# Altium PCB R3D902.PcbDoc
Units mil, origin at the board's own origin, x right, y up, seen from the top; angles counter-clockwise.
Board outline 3947.04 x 3947.04 mil, 2 copper layers (Top Layer, Bottom Layer); 90 components, 0 nets, 371 pads, 65 vias.
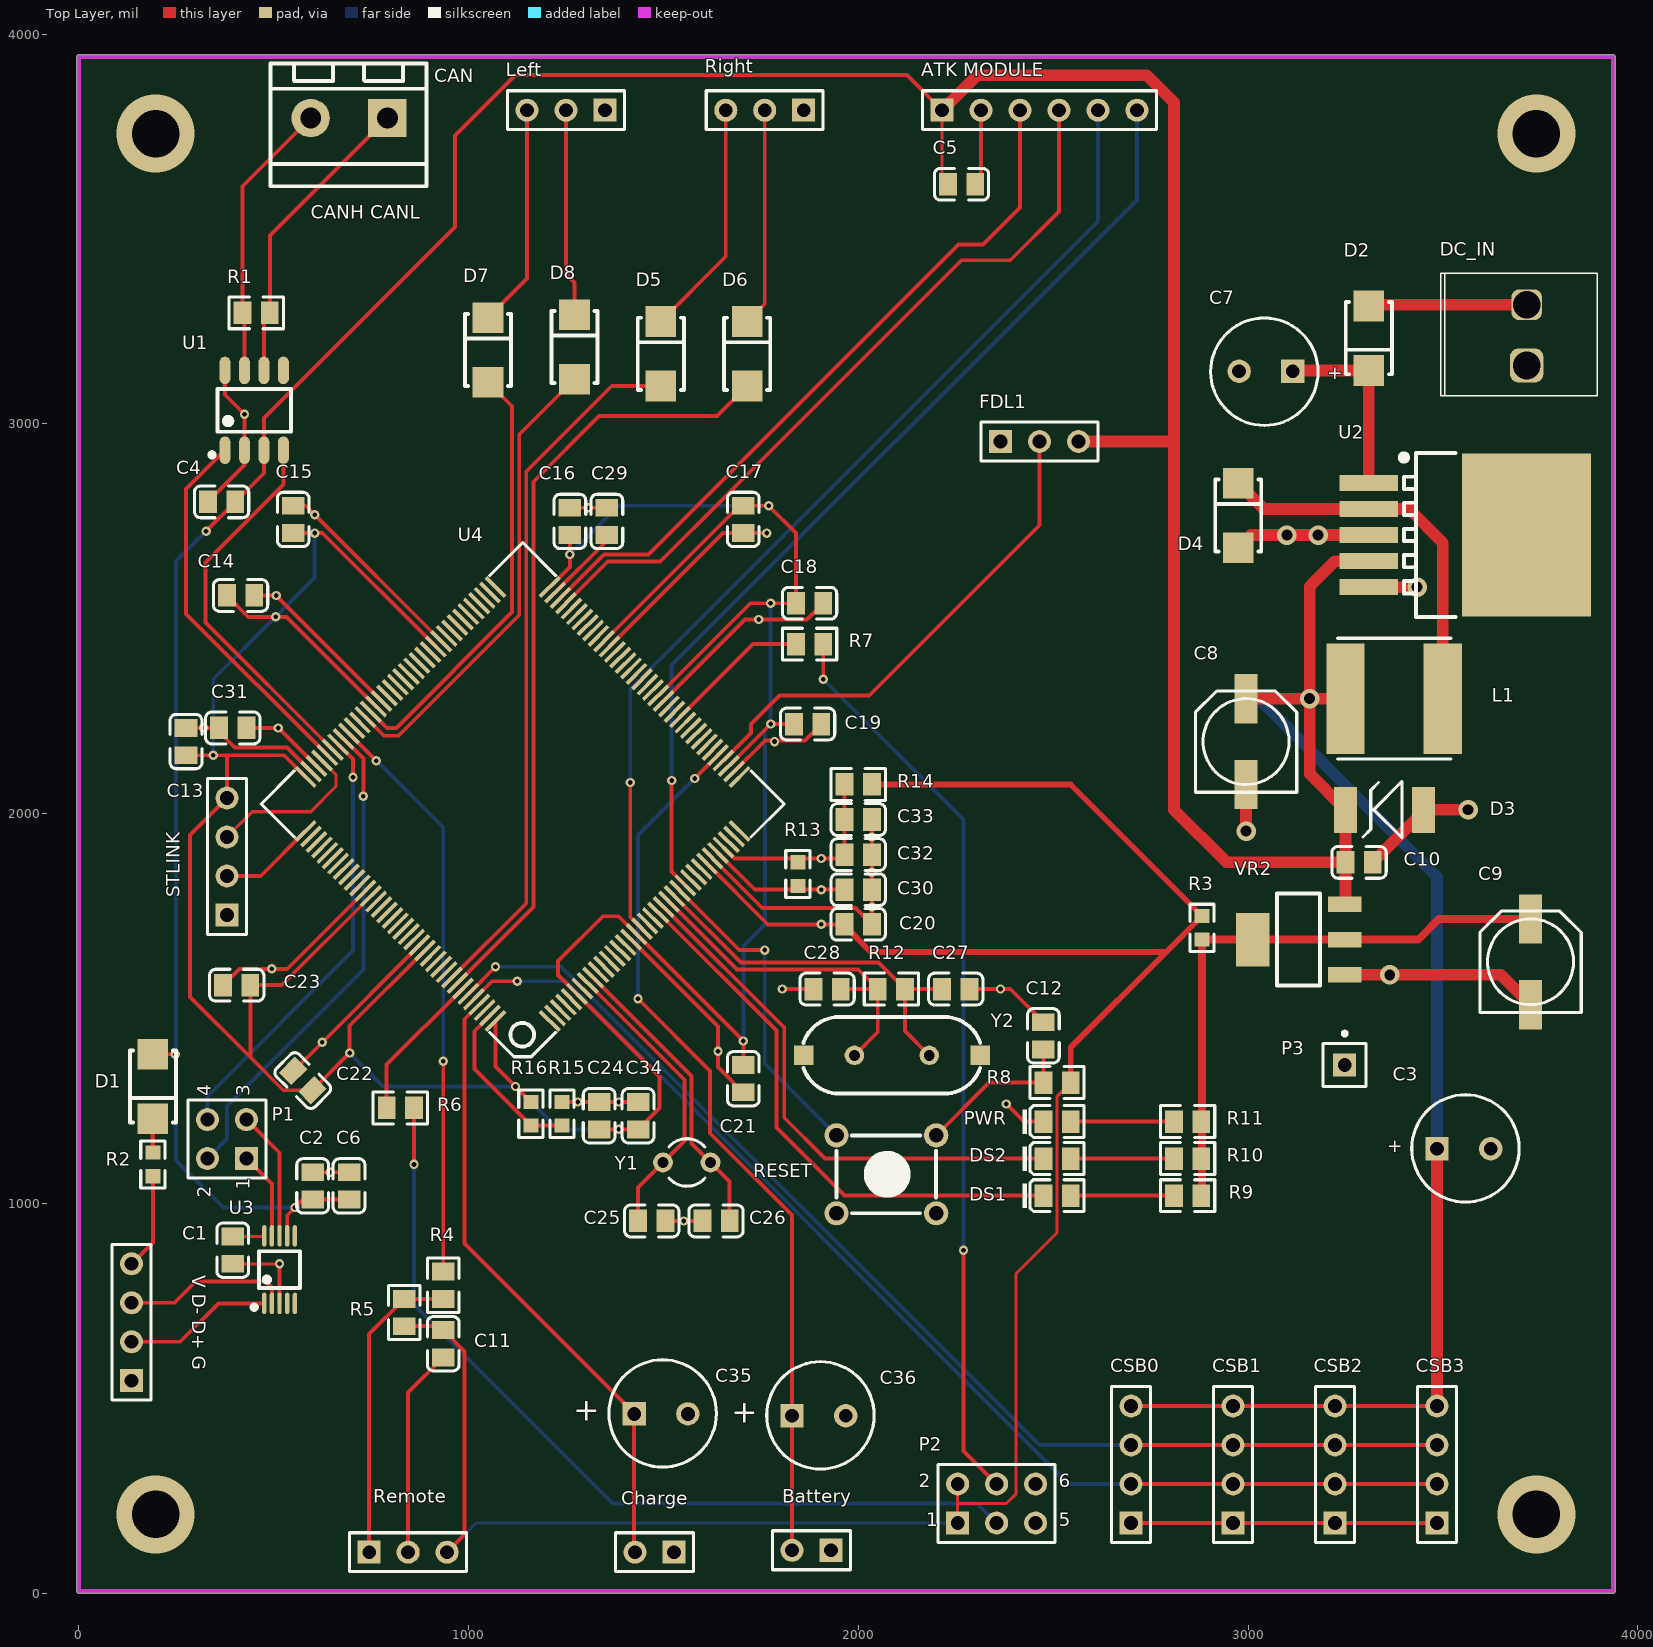
[diagram p0: Top Layer view]
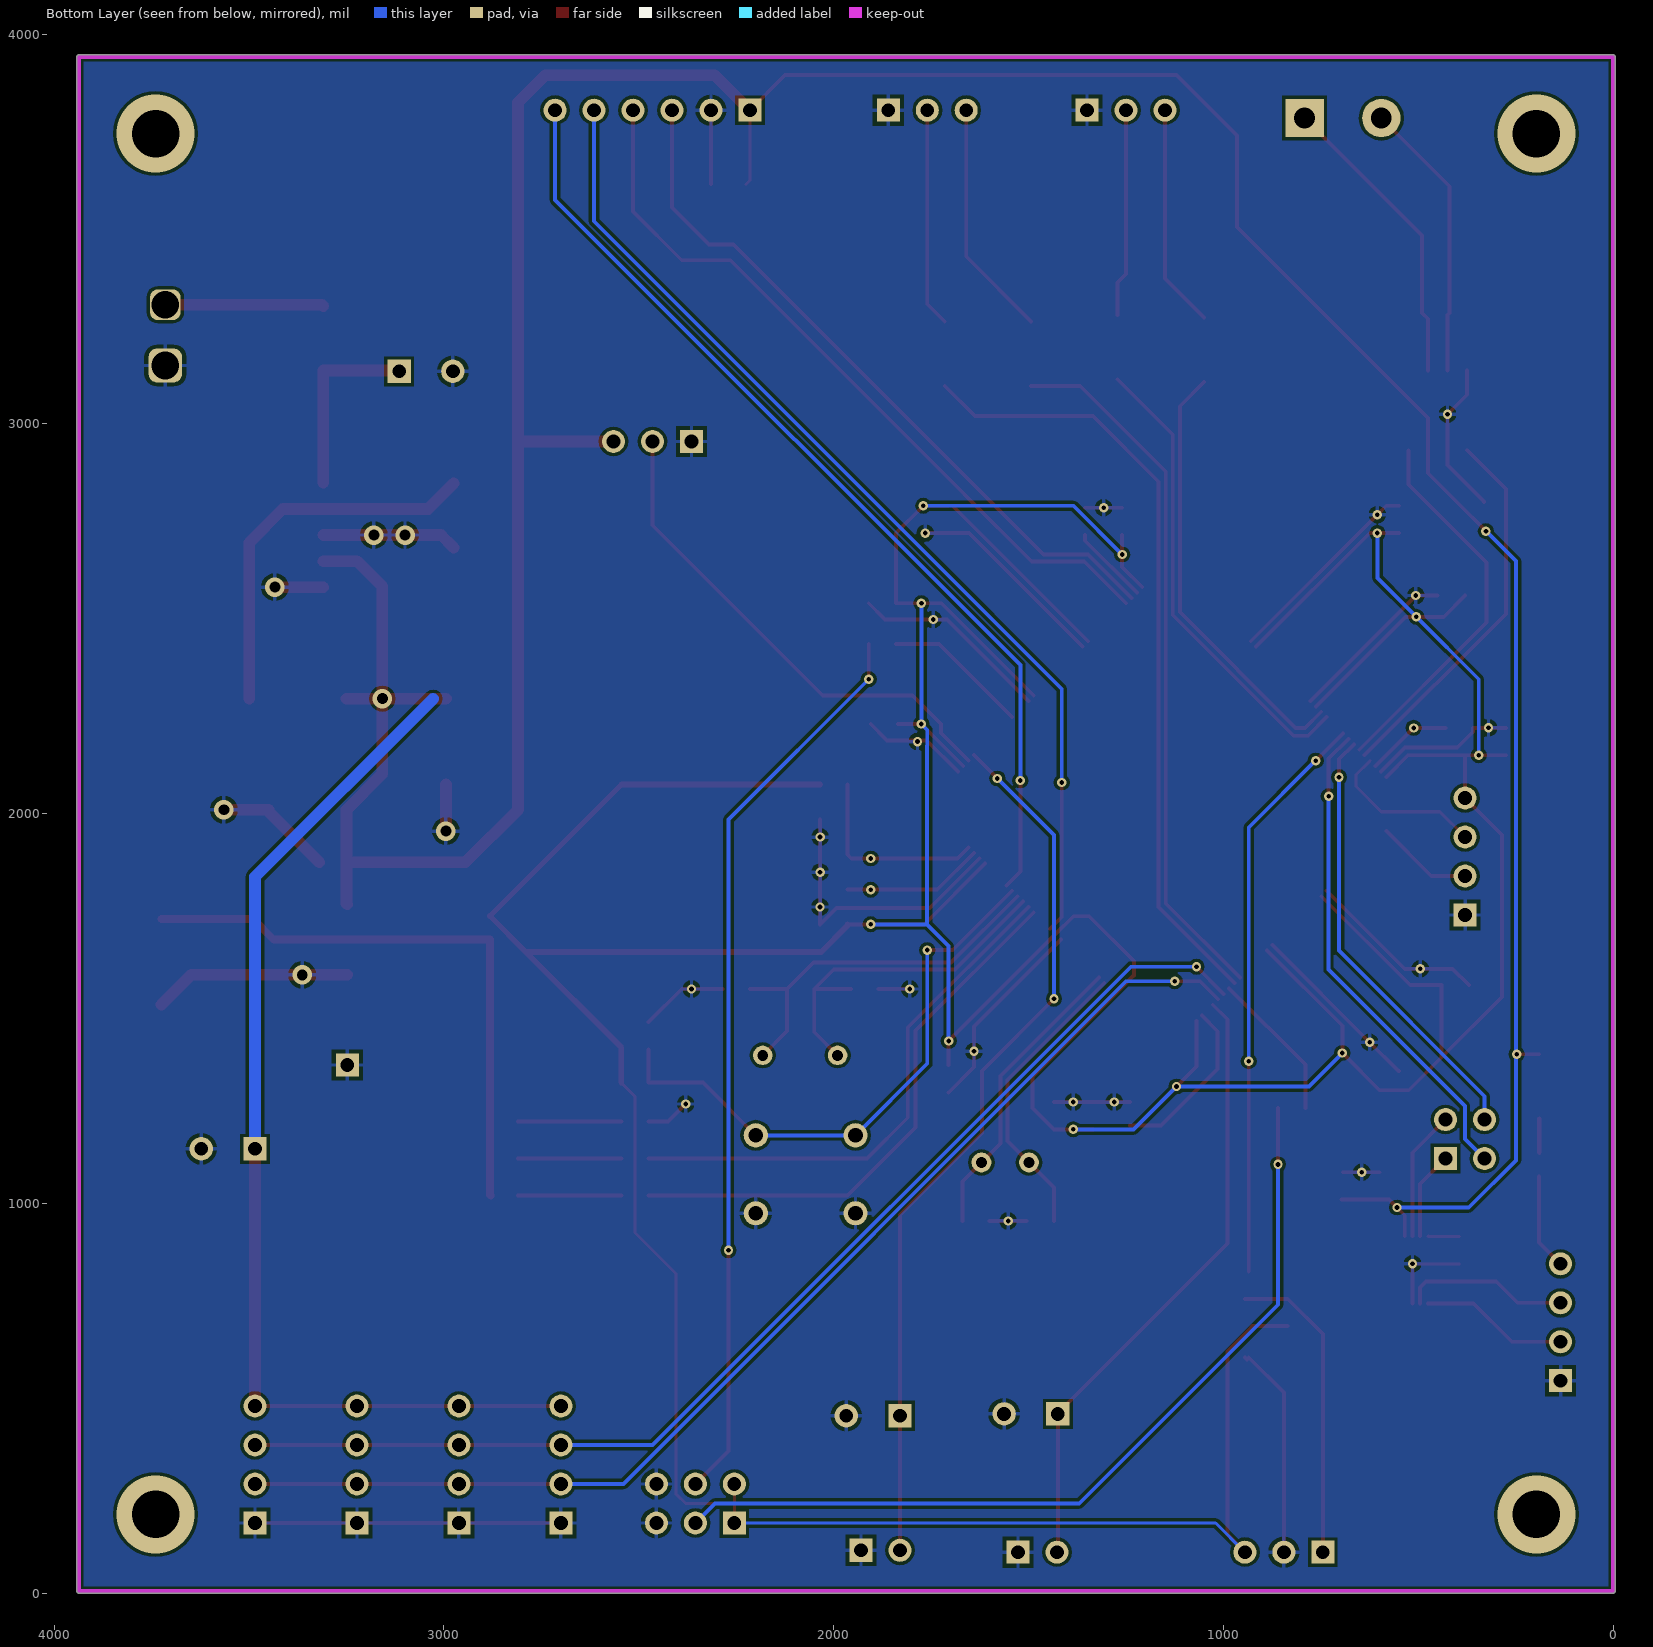
[diagram p1: Bottom Layer view, seen from below]

## Layer stack, top to bottom
Top Solder: solder mask 0.4, Solder Resist, Dk 3.5
Top Layer: signal copper 1.4
Dielectric 1: dielectric 12.6, FR-4, Dk 4.8
Bottom Layer: signal copper 1.4
Bottom Solder: solder mask 0.4, Solder Resist, Dk 3.5

## Board outline
0,-0.01 cw(c0,5) -5.01,5 -5.01,3942.01 cw(c0,3942.01) 0,3947.02 3937.01,3947.02 cw(c3937.01,3942.01) 3942.02,3942.01 3942.02,5 cw(c3937.01,5) 3937.01,-0.01

## Design rules (kind name [scope] priority, off if disabled: settings)
Clearance [All] p1: gap=10 ignorepadtopadclearanceinfootprint=FALSE except(0: Arc-Hole Track-Hole SMDPad-Hole THPad-Hole Via-Hole Fill-Hole Poly-Hole Region-Hole Text-Hole)
PolygonConnect [All] p1: connectstyle=Relief reliefconductorwidth=10 reliefentries=4 polygonreliefangle="90 Angle" airgapwidth=10
RoutingVias [All] p1: holewidth=28 width=50 viastyle="Through Hole" minholewidth=28 minwidth=50 maxholewidth=28 maxwidth=50
SolderMaskExpansion [All] p1: expansion=4
Width [All] p1: maxlimit=10 minlimit=10 preferedwidth=10
30 further rules are at their usual default settings.

## Components (designator, comment, footprint, x,y, rotation, side; value= is the part's Value field where it differs from the comment)
"ATK MODULE" "Header 6" HDR1X6 2215,3805 r0 top locked
Battery "Header 2" HDR1X2 1930,110 r180 top locked
C1 "100nF(104) 10% 50V" LC-0805_C 395,880 r270 top locked
C2 "100nF(104) 10% 50V" LC-0805_C 600,1045 r90 top locked
C3 "Cap" CAP-DIP-3.5 3485,1140 r180 top locked
C4 "100nF(104) 10% 50V" LC-0805_C 366.42,2800 r180 top locked
C5 "100nF(104) 10% 50V" LC-0805_C 2265,3615 r180 top locked
C6 "10uF (106) 10% 25V" LC-0805_C 693.35,1045 r90 top locked
C7 "Cap" CAP-DIP-3.5 3115,3135 r0 top locked
C8 "220uF" CC6.56.5 2995,2185 r270 top locked
C9 "22uF" CC6.56.5 3725,1620 r270 top locked
C10 "10uF (106) 10% 25V" LC-0805_C 3285,1875 r180 top locked
C11 "100nF(104) 10% 50V" LC-0805_C 935,639.96 r90 top locked
C12 "100nF(104) 10% 50V" LC-0805_C 2474.96,1430 r270 top locked
C13 "100nF(104) 10% 50V" LC-0805_C 275,2185.04 r90 top locked
C14 "100nF(104) 10% 50V" LC-0805_C 415,2559.92 r0 top locked
C15 "100nF(104) 10% 50V" LC-0805_C 550,2755 r90 top locked
C16 "100nF(104) 10% 50V" LC-0805_C 1260,2750 r90 top locked
C17 "100nF(104) 10% 50V" LC-0805_C 1705,2755 r270 top locked
C18 "100nF(104) 10% 50V" LC-0805_C 1875,2540 r0 top locked
C19 "100nF(104) 10% 50V" LC-0805_C 1870,2230 r0 top locked
C20 "100nF(104) 10% 50V" LC-0805_C 2000,1716.06 r0 top locked
C21 "100nF(104) 10% 50V" LC-0805_C 1705,1320 r270 top locked
C22 "100nF(104) 10% 50V" LC-0805_C 574.78,1315.22 r135 top locked
C23 "100nF(104) 10% 50V" LC-0805_C 405,1560 r180 top locked
C24 "100nF(104) 10% 50V" LC-0805_C 1335,1225 r90 top locked
C25 "1.0pF (010) 0.25pF 50V" LC-0805_C 1469.96,955 r180 top locked
C26 "1.0pF (010) 0.25pF 50V" LC-0805_C 1635,955 r0 top locked
C27 "22pF (220) 5% 50V" LC-0805_C 2250,1550 r180 top locked
C28 "22pF (220) 5% 50V" LC-0805_C 1919.96,1550 r0 top locked
C29 "2.2uF (225) 20% 50V" LC-0805_C 1355,2750 r90 top locked
C30 "2.2uF (225) 20% 50V" LC-0805_C 2000,1805 r180 top locked
C31 "2.2uF (225) 20% 50V" LC-0805_C 395,2220 r180 top locked
C32 "10uF (106) 10% 25V" LC-0805_C 2000,1895 r180 top locked
C33 "100nF(104) 10% 50V" LC-0805_C 2000,1985 r180 top locked
C34 "100nF(104) 10% 50V" LC-0805_C 1435,1225 r90 top locked
C35 "Cap" CAP-DIP-3.5 1425,460 r180 top locked
C36 "Cap" CAP-DIP-3.5 1830,455 r180 top locked
CAN "CAN" HEAD2L-0.8 791.85,3785 r180 top locked
Charge "Header 2" HDR1X2 1527.2,105 r180 top locked
CSB0 "Header 4" HDR1X4 2700,180 r90 top locked
CSB1 "Header 4" HDR1X4 2961.67,180 r90 top locked
CSB2 "Header 4" HDR1X4 3223.33,180 r90 top locked
CSB3 "Header 4" HDR1X4 3485,180 r90 top locked
D1 "SS210" LC-SMA(DO-214AC)_S1 190,1300 r90 top locked
D2 "SS210" LC-SMA(DO-214AC)_S1 3310,3220 r90 top locked
D3 "SMBJ5.0A" SMBJ 3355,2010 r180 top locked
D4 "SS54" LC-SMA(DO-214AC)_S1 2975,2765 r270 top locked
D5 "SS210" LC-SMA(DO-214AC)_S1 1493.33,3180 r270 top locked
D6 "SS210" LC-SMA(DO-214AC)_S1 1715,3180 r270 top locked
D7 "SS210" LC-SMA(DO-214AC)_S1 1050,3190 r270 top locked
D8 "SS210" LC-SMA(DO-214AC)_S1 1271.67,3197.32 r270 top locked
DC_IN "Header 2" "VH-2A - Circle Hole" 3715,3150 r90 top locked
DS1 "红灯 0805" LC-0805_LED_S1 2510,1020 r0 top locked
DS2 "翠绿 0805" LC-0805_LED_S1 2510,1115 r0 top locked
FDL1 "Header 3" HDR1X3 2365,2955 r0 top locked
L1 "33uH" L_SOP74 3250,2295 r0 top locked
Left "Header 3" HDR1X3 1350,3805 r180 top locked
P1 "Header 2X2" HDR2X2 430,1115 r90 top locked
P2 "Header 3X2" HDR2X3 2255,180 r0 top locked
P3 "Plug" PIN1 3248.11,1355.04 r0 top locked
PWR "蓝灯 0805" LC-0805_LED_S1 2510,1210 r0 top locked
R1 "120Ω (1200) ±1%" LC-0805_R 455,3285 r180 top locked
R2 "1Ω (1R00) ±1%" LC-0603_R 190,1100 r270 top locked
R3 "0Ω (0R0) ±1%" LC-0603_R 2882.18,1707.18 r90 top locked
R4 "1KΩ (1001) ±1%" LC-0805_R 935,789.96 r270 top locked
R5 "4.7KΩ (4701) ±1%" LC-0805_R 835,719.96 r270 top locked
R6 "10KΩ (1002) ±1%" LC-0805_R 825,1244.88 r0 top locked
R7 "10KΩ (1002) ±1%" LC-0805_R 1875,2435 r180 top locked
R8 "10KΩ (1002) ±1%" LC-0805_R 2510,1310 r180 top locked
R9 "510KΩ (5103) ±1%" LC-0805_R 2845,1020 r0 top locked
R10 "510KΩ (5103) ±1%" LC-0805_R 2845,1115 r0 top locked
R11 "510KΩ (5103) ±1%" LC-0805_R 2845,1210 r0 top locked
R12 "1MΩ (1004) ±1%" LC-0805_R 2085,1550 r180 top locked
R13 "0Ω (0R0) ±1%" LC-0603_R 1845,1845 r90 top locked
R14 "10Ω (10R0) ±1%" LC-0805_R 2000,2075 r0 top locked
R15 "0Ω (0R0) ±1%" LC-0603_R 1240,1230 r90 top locked
R16 "0Ω (0R0) ±1%" LC-0603_R 1160,1230 r90 top locked
Remote "Header 3" HDR1X3 745,105 r0 top locked
RESET "KEY_M" KEY_M 1944.09,1174.69 r0 top locked
Right "Header 3" HDR1X3 1860,3805 r180 top locked
STLINK "Header 4" HDR1X4 380,1740 r90 top locked
U1 "CAN/TJA1050T/CM" LC-SOIC-8_150mil 450,3035 r0 top locked
U2 "LM2596SX-5.0/NOPB" LC-TO-263-5 3309.49,2715 r180 top locked
U3 "CH340E" LC-MSOP-10 515,830 r0 top locked
U4 "STM32F407ZET6" LQFP144 1208.14,1468.34 r135 top locked
"V D- D+ G" "Header 4" HDR1X4 135,545 r90 top locked (schematic designator "G D+ D- V")
VR2 "AMS1117-3.3" LC-SOT-223 3130,1676.87 r0 top locked
Y1 "32.768K" R38 1560,1105 r90 top locked
Y2 "8MHz" XTAL_US 2182.13,1380 r180 top locked

## Footprints (in the part's own frame and the unit in brackets; to place one, negate y for a bottom-side part, rotate by r counter-clockwise, add the part's x,y. Pads: shape width x height; smd on the part's side, far side on the other; paste and mask are expansions set on the pad)
CAP-DIP-3.5 [mil]
  rect 60x60 hole 35.43: 1(0,0)
  round 60 hole 35.43: 2(-137.8,0)
  silkscreen extent -211,-139 65,137
CC6.56.5 [mm]
  rect 3.2x1.5 smd: 1(-2.794,0) 2(2.8,0)
  silkscreen extent -3.3,-3.3 3.3,3.3
HDR1X2 [mm] "Connector; Header; 2 Position"
  rect 1.5x1.5 hole 0.9: 1(0,0)
  round 1.5 hole 0.9: 2(2.54,0)
  silkscreen extent -1.27,-1.27 3.81,1.27
HDR1X3 [mm] "Connector; Header; 3 Position"
  rect 1.5x1.5 hole 0.9: 1(0,0)
  round 1.5 hole 0.9: 2(2.54,0) 3(5.08,0)
  silkscreen extent -1.27,-1.27 6.35,1.27
HDR1X4 [mm] "Connector; Header; 4 Position"
  rect 1.5x1.5 hole 0.9: 1(0,0)
  round 1.5 hole 0.9: 2(2.54,0) 3(5.08,0) 4(7.62,0)
  silkscreen extent -1.27,-1.27 8.89,1.27
HDR1X6 [mm] "Connector; Header; 6 Position"
  rect 1.5x1.5 hole 0.9: 1(0,0)
  round 1.5 hole 0.9: 2(2.54,0) 3(5.08,0) 4(7.62,0) 5(10.16,0) 6(12.7,0)
  silkscreen extent -1.27,-1.27 13.97,1.27
HDR2X2 [mm] "Connector; Header; 2x2 Position"
  rect 1.5x1.5 hole 0.9: 1(0,0)
  round 1.5 hole 0.9: 2(0,2.54) 3(2.54,0) 4(2.54,2.54)
  silkscreen extent -1.27,-1.27 3.81,3.81
HDR2X3 [mm] "Connector; Header; 3x2 Position"
  rect 1.5x1.5 hole 0.9: 1(0,0)
  round 1.5 hole 0.9: 2(0,2.54) 3(2.54,0) 4(2.54,2.54) 5(5.08,0) 6(5.08,2.54)
  silkscreen extent -1.27,-1.27 6.35,3.81
HEAD2L-0.8 [mm]
  rect 2.5x2.5 hole 1.35: 1(0,0)
  round 2.5 hole 1.35: 2(5,0)
  silkscreen extent -2.54,-3.56 7.62,4.45
KEY_M [mil]
  round 62 hole 38: 1(0,0) 1(255.91,0) 2(0,-200) 2(255.91,-200)
  silkscreen extent 0,-200 255,0
L_SOP74 [mm]
  rect 2.5x7.2 smd: 1(0,0) 2(6.35,0)
  silkscreen extent -0.51,-3.94 6.89,3.94
LC-0603_R [mm]
  rect 0.93x0.98 smd: 1(-0.77,0) 2(0.77,0)
  silkscreen extent -1.53,-0.79 1.54,0.79, body extent -0.85,-0.4 0.85,0.4, height 0.56
LC-0805_C [mm]
  rect 1.16x1.47 smd: 1(-0.89,0) 2(0.89,0)
  silkscreen extent -1.77,-1.04 1.77,1.04, body extent -1,-0.62 1,0.63, height 0.77
LC-0805_LED_S1 [mm]
  rect 1.16x1.47 smd: A(0.89,0) K(-0.89,0)
  silkscreen extent -2.24,-1.04 1.77,1.03, body extent -1.01,-0.62 1.01,0.62, height 1.1
LC-0805_R [mm]
  rect 1.16x1.47 smd: 1(-0.89,0) 2(0.89,0)
  silkscreen extent -1.77,-1.04 1.77,1.03, body extent -1,-0.62 1,0.63, height 0.49
LC-MSOP-10 [mm]
  oval 0.28x1.4 smd mask+0.051: 1(-1,-2.2) 2(-0.5,-2.2) 3(0,-2.2) 4(0.5,-2.2) 5(1,-2.2) 6(1,2.2) 7(0.5,2.2) 8(0,2.2) 9(-0.5,2.2) 10(-1,2.2)
  silkscreen extent -1.8,-2.6 1.33,1.2
LC-SMA(DO-214AC)_S1 [mm]
  rect 2x2 smd: 1(2.1,0) 2(-2.1,0)
  silkscreen extent -2.35,-1.5 2.35,1.5
LC-SOIC-8_150mil [mm]
  oval 0.7x1.8 smd: 1(-1.905,-2.6) 2(-0.635,-2.6) 3(0.635,-2.6) 4(1.905,-2.6) 5(1.905,2.6) 6(0.635,2.6) 7(-0.635,2.6) 8(-1.905,2.6)
  silkscreen extent -2.9,-3.05 2.4,1.4
LC-SOT-223 [mm]
  rect 2.2x1 smd: 1(3,-2.3) 2(3,0) 3(3,2.3)
  rect 2.2x3.5 smd: 2(-3,0)
  silkscreen extent -1.4,-3 1.4,3, body extent -3.49,-3.24 3.49,3.24, height 1.64
LC-TO-263-5 [mm]
  rect 8.4x10.65 smd: 0(-10.3,0)
  rect 3.8x1.05 smd: 1(0,-3.4) 2(0,-1.7) 3(0,0) 4(0,1.7) 5(0,3.4)
  silkscreen extent -5.65,-5.35 -2.1,5.35
LQFP144 [mil]
  rect 70.87x10 smd: 1(-0.35,0.02) 2(-0.35,-19.66) 3(-0.35,-39.35) 4(-0.35,-59.03) 5(-0.35,-78.72) 6(-0.35,-98.4) 7(-0.35,-118.09) 8(-0.35,-137.77) 9(-0.35,-157.46) 10(-0.35,-177.14) 11(-0.35,-196.83) 12(-0.35,-216.51) 13(-0.35,-236.2) 14(-0.35,-255.88) 15(-0.35,-275.57) 16(-0.35,-295.25) 17(-0.35,-314.94) 18(-0.35,-334.62) 19(-0.35,-354.31) 20(-0.35,-373.99) 21(-0.35,-393.68) 22(-0.35,-413.36) 23(-0.35,-433.05) 24(-0.35,-452.73) 25(-0.35,-472.42) 26(-0.35,-492.1) 27(-0.35,-511.79) 28(-0.35,-531.47) 29(-0.35,-551.16) 30(-0.35,-570.84) 31(-0.35,-590.53) 32(-0.35,-610.21) 33(-0.35,-629.9) 34(-0.35,-649.58) 35(-0.35,-669.27) 36(-0.35,-688.95) 73(885.47,-688.95) 74(885.47,-669.27) 75(885.47,-649.58) 76(885.47,-629.9) 77(885.47,-610.21) 78(885.47,-590.53) 79(885.47,-570.84) 80(885.47,-551.16) 81(885.47,-531.47) 82(885.47,-511.79) 83(885.47,-492.1) 84(885.47,-472.42) 85(885.47,-452.73) 86(885.47,-433.05) 87(885.47,-413.36) 88(885.47,-393.68) 89(885.47,-373.99) 90(885.47,-354.31) 91(885.47,-334.62) 92(885.47,-314.94) 93(885.47,-295.25) 94(885.47,-275.57) 95(885.47,-255.88) 96(885.47,-236.2) 97(885.47,-216.51) 98(885.47,-196.83) 99(885.47,-177.14) 100(885.47,-157.46) 101(885.47,-137.77) 102(885.47,-118.09) 103(885.47,-98.4) 104(885.47,-78.72) 105(885.47,-59.03) 106(885.47,-39.35) 107(885.47,-19.66) 108(885.47,0.02)
  rect 10x70.87 smd: 37(98.07,-787.38) 38(117.76,-787.38) 39(137.44,-787.38) 40(157.13,-787.38) 41(176.81,-787.38) 42(196.5,-787.38) 43(216.18,-787.38) 44(235.87,-787.38) 45(255.55,-787.38) 46(275.24,-787.38) 47(294.92,-787.38) 48(314.61,-787.38) 49(334.29,-787.38) 50(353.98,-787.38) 51(373.66,-787.38) 52(393.35,-787.38) 53(413.03,-787.38) 54(432.72,-787.38) 55(452.4,-787.38) 56(472.09,-787.38) 57(491.77,-787.38) 58(511.46,-787.38) 59(531.14,-787.38) 60(550.83,-787.38) 61(570.51,-787.38) 62(590.2,-787.38) 63(609.88,-787.38) 64(629.57,-787.38) 65(649.25,-787.38) 66(668.94,-787.38) 67(688.62,-787.38) 68(708.31,-787.38) 69(727.99,-787.38) 70(747.68,-787.38) 71(767.36,-787.38) 72(787.05,-787.38) 109(787.05,98.45) 110(767.36,98.45) 111(747.68,98.45) 112(727.99,98.45) 113(708.31,98.45) 114(688.62,98.45) 115(668.94,98.45) 116(649.25,98.45) 117(629.57,98.45) 118(609.88,98.45) 119(590.2,98.45) 120(570.51,98.45) 121(550.83,98.45) 122(531.14,98.45) 123(511.46,98.45) 124(491.77,98.45) 125(472.09,98.45) 126(452.4,98.45) 127(432.72,98.45) 128(413.03,98.45) 129(393.35,98.45) 130(373.66,98.45) 131(353.98,98.45) 132(334.29,98.45) 133(314.61,98.45) 134(294.92,98.45) 135(275.24,98.45) 136(255.55,98.45) 137(235.87,98.45) 138(216.18,98.45) 139(196.5,98.45) 140(176.81,98.45) 141(157.13,98.45) 142(137.44,98.45) 143(117.76,98.45) 144(98.07,98.45)
  silkscreen extent -32,-819 917,130
PIN1 [mm] "Connector; Plug"
  rect 1.5x1.5 hole 0.9: 1(0,0)
  silkscreen extent -1.4,-1.4 1.4,2.17
R38 [mm] "Crystal, Thru-Hole; 2 Leads; Body 3.1 x 8.2 mm (Dia.xH)"
  round 1.3 hole 0.7: 1(0,1.55) 2(0,-1.55)
  silkscreen extent -1.55,-1.19 1.55,1.17
SMBJ [mm]
  rect 1.5x3 smd: 1(-2.413,0) 2(2.667,0)
  silkscreen extent -1.02,-1.85 1.52,1.83
"VH-2A - Circle Hole" [mm] "Header 2 use for Power"
  rrect50% 2.2x2.2 hole 1.8: 1(0,0)
  rrect50% 2x2 hole 1.8: 2(3.96,0)
  silkscreen extent -1.98,-4.6 6.02,5.61
XTAL_US [mil]
  round 50 hole 28: 1(0,0) 2(192.13,0)
  rect 50x50 smd: ""(-130.32,0) ""(322.44,0)
  silkscreen extent -131,-98 323,98

## Part data
"ATK MODULE": "Header, 6-Pin", LatestRevisionDate=17-Jul-2002, LatestRevisionNote="Re-released for DXP Platform.", Publisher="Altium Limited"
Battery Charge: "Header, 2-Pin", LatestRevisionDate=17-Jul-2002, LatestRevisionNote="Re-released for DXP Platform.", Publisher="Altium Limited"
C1 C2 C4 C5 C11 C12 C13 C14 C15 C16 C17 C18 C19 C20 C21 C22 C23 C24 C33 C34: library part "0805 100nF(104) 10% 50V", "贴片电容", Package=0805, SuppliersPartNumber=C49678, ComponentLink1Description=供?, ComponentLink1URL=http://www.szlcsc.com/product/details_50686.html, Supplier=LC
C3 C7 C35 C36: library part Cap_DIP, "Cap_DIP"
C6 C10 C32: library part "0805 10uF (106) 10% 25V", "贴片电容", Package=0805, SuppliersPartNumber=C15850, ComponentLink1Description=供?, ComponentLink1URL=http://www.szlcsc.com/product/details_16532.html, Supplier=LC
C8 C9: library part CAP
C25 C26: library part "0805 1.0pF (010) 0.25pF 50V", "贴片电容", Package=0805, SuppliersPartNumber=C14971, ComponentLink1Description=供?, ComponentLink1URL=http://www.szlcsc.com/product/details_15644.html, Supplier=LC
C27 C28: library part "0805 22pF (220) 5% 50V", "贴片电容", Package=0805, SuppliersPartNumber=C1804, ComponentLink1Description=供?, ComponentLink1URL=http://www.szlcsc.com/product/details_2156.html, Supplier=LC
C29 C30 C31: library part "0805 2.2uF (225) 20% 50V", "贴片电容", Package=0805, SuppliersPartNumber=C49217, ComponentLink1Description=供?, ComponentLink1URL=http://www.szlcsc.com/product/details_50225.html, Supplier=LC
CAN: library part HEAD2
CSB0 CSB1 CSB2 CSB3 STLINK "V D- D+ G": "Header, 4-Pin", LatestRevisionDate=17-Jul-2002, LatestRevisionNote="Re-released for DXP Platform.", Publisher="Altium Limited"
D1 D2 D5 D6 D7 D8: library part "SMA(DO-214AC) SS210", "二极管", Package=SMA(DO-214AC), SuppliersPartNumber=C14996, ComponentLink1Description=供?, ComponentLink1URL=http://www.szlcsc.com/product/details_15669.html, Supplier=LC
D3: library part SMBJ, "TVS"
D4: library part "SMA(DO-214AC) SS54", "二极管", Package=SMA(DO-214AC), SuppliersPartNumber=C22452, ComponentLink1Description=供?, ComponentLink1URL=http://www.szlcsc.com/product/details_23178.html, Supplier=LC
DC_IN: "贴片2p座"
DS1: library part "0805 红灯", "发光二极管", Package=0805, SuppliersPartNumber=C2295, ComponentLink1Description=供?, ComponentLink1URL=http://www.szlcsc.com/product/details_2668.html, Supplier=LC
DS2: library part "0805 翠绿", "发光二极管", Package=0805, SuppliersPartNumber=C2297, ComponentLink1Description=供?, ComponentLink1URL=http://www.szlcsc.com/product/details_2670.html, Supplier=LC
FDL1 Left Remote Right: "Header, 3-Pin", LatestRevisionDate=17-Jul-2002, LatestRevisionNote="Re-released for DXP Platform.", Publisher="Altium Limited"
L1: library part L_SOP
P1: "Header, 2-Pin, Dual row", LatestRevisionDate=17-Jul-2002, LatestRevisionNote="Re-released for DXP Platform.", Publisher="Altium Limited"
P2: "Header, 3-Pin, Dual row", LatestRevisionDate=17-Jul-2002, LatestRevisionNote="Re-released for DXP Platform.", Publisher="Altium Limited"
PWR: library part "0805 蓝灯", "发光二极管", Package=0805, SuppliersPartNumber=C2293, ComponentLink1Description=供?, ComponentLink1URL=http://www.szlcsc.com/product/details_2666.html, Supplier=LC
R1: library part "0805 120Ω (1200) 1%", "贴片电阻", Package=0805, SuppliersPartNumber=C17437, ComponentLink1Description=供?, ComponentLink1URL=http://www.szlcsc.com/product/details_18125.html, Supplier=LC
R2: library part "0603 1Ω (1R00) 1%", "贴片电阻", Package=0603, SuppliersPartNumber=C22936, ComponentLink1Description=供?, ComponentLink1URL=http://www.szlcsc.com/product/details_23663.html, Supplier=LC
R3 R13 R15 R16: library part "0603 0Ω (0R0) 1%", "贴片电阻", Package=0603, SuppliersPartNumber=C21189, ComponentLink1Description=供?, ComponentLink1URL=http://www.szlcsc.com/product/details_21903.html, Supplier=LC
R4: library part "0805 1KΩ (1001) 1%", "贴片电阻", Package=0805, SuppliersPartNumber=C17513, ComponentLink1Description=供?, ComponentLink1URL=http://www.szlcsc.com/product/details_18201.html, Supplier=LC
R5: library part "0805 4.7KΩ (4701) 1%", "贴片电阻", Package=0805, SuppliersPartNumber=C17673, ComponentLink1Description=供?, ComponentLink1URL=http://www.szlcsc.com/product/details_18361.html, Supplier=LC
R6 R7 R8: library part "0805 10KΩ (1002) 1%", "贴片电阻", Package=0805, SuppliersPartNumber=C17414, ComponentLink1Description=供?, ComponentLink1URL=http://www.szlcsc.com/product/details_18102.html, Supplier=LC
R9 R10 R11: library part "0805 510KΩ (5103) 1%", "贴片电阻", Package=0805, SuppliersPartNumber=C17733, ComponentLink1Description=供?, ComponentLink1URL=http://www.szlcsc.com/product/details_18421.html, Supplier=LC
R12: library part "0805 1MΩ (1004) 1%", "贴片电阻", Package=0805, SuppliersPartNumber=C17514, ComponentLink1Description=供?, ComponentLink1URL=http://www.szlcsc.com/product/details_18202.html, Supplier=LC
R14: library part "0805 10Ω (10R0) 1%", "贴片电阻", Package=0805, SuppliersPartNumber=C17415, ComponentLink1Description=供?, ComponentLink1URL=http://www.szlcsc.com/product/details_18103.html, Supplier=LC
U1: "CAN", Package=SOIC-8_150mil, SuppliersPartNumber=C6952, ComponentLink1Description=供?, ComponentLink1URL=http://www.szlcsc.com/product/details_7424.html, Supplier=LC
U2: "DC-DCоƬ", Package=TO-263-5, SuppliersPartNumber=C10002, ComponentLink1Description=供?, ComponentLink1URL=http://www.szlcsc.com/product/details_10538.html, Supplier=LC
U3: "USB", Package=SOIC-16_150mil, SuppliersPartNumber=C14267, ComponentLink1Description=供?, ComponentLink1URL=http://www.szlcsc.com/product/details_14927.html, Supplier=LC
VR2: library part "SOT-223 AMS1117-3.3", "低压差线性稳压(LDO)", Package=SOT-223, SuppliersPartNumber=C6186, ComponentLink1Description=供?, ComponentLink1URL=http://www.szlcsc.com/product/details_6652.html, Supplier=LC
Y1 Y2: library part XTAL, "Crystal Oscillator", LatestRevisionDate=17-Jul-2002, LatestRevisionNote="Re-released for DXP Platform.", Published=8-Jun-2000, Publisher="Altium Limited"
  Y1: PackageDescription="Crystal, Thru-Hole; 2 Leads; Body 3.1 x 8.2 mm (Dia.xH)", PackageReference=R38
P3: LatestRevisionDate=17-Jul-2002, LatestRevisionNote="Re-released for DXP Platform.", Publisher="Altium Limited"

## Via types
v1: diameter 24, hole 12, Top Layer to Bottom Layer, 54 vias
v2: diameter 50, hole 28, Top Layer to Bottom Layer, 7 vias
v3: diameter 200.79, hole 122.05, Top Layer to Bottom Layer, 4 vias

## Nets (pads, with @x,y where several pads share a name; then routed paths per layer and width w, separated by ;. In a path a pad name is that pad's centre, name@x,y a point inside that pad or via, vN(x,y) a via of type N, cw(c..) or ccw(c..) an arc to the next point about the centre after c; other vN are vias at no path point)
pads on no net: "ATK MODULE.1" "ATK MODULE.2" "ATK MODULE.3" "ATK MODULE.4" "ATK MODULE.5" "ATK MODULE.6" "V D- D+ G.1" "V D- D+ G.2" "V D- D+ G.3" "V D- D+ G.4" Battery.1 Battery.2 C1.1 C1.2 C2.1 C2.2 C3.1 C3.2 C4.1 C4.2 C5.1 C5.2 C6.1 C6.2 C7.1 C7.2 C8.1 C8.2 C9.1 C9.2 C10.1 C10.2 C11.1 C11.2 C12.1 C12.2 C13.1 C13.2 C14.1 C14.2 C15.1 C15.2 C16.1 C16.2 C17.1 C17.2 C18.1 C18.2 C19.1 C19.2 C20.1 C20.2 C21.1 C21.2 C22.1 C22.2 C23.1 C23.2 C24.1 C24.2 C25.1 C25.2 C26.1 C26.2 C27.1 C27.2 C28.1 C28.2 C29.1 C29.2 C30.1 C30.2 C31.1 C31.2 C32.1 C32.2 C33.1 C33.2 C34.1 C34.2 C35.1 C35.2 C36.1 C36.2 CAN.1 CAN.2 Charge.1 Charge.2 CSB0.1 CSB0.2 CSB0.3 CSB0.4 CSB1.1 CSB1.2 CSB1.3 CSB1.4 CSB2.1 CSB2.2 CSB2.3 CSB2.4 CSB3.1 CSB3.2 CSB3.3 CSB3.4 D1.1 D1.2 D2.1 D2.2 D3.1 D3.2 D4.1 D4.2 D5.1 D5.2 D6.1 D6.2 D7.1 D7.2 D8.1 D8.2 DC_IN.1 DC_IN.2 DS1.A DS1.K DS2.A DS2.K FDL1.1 FDL1.2 FDL1.3 L1.1 L1.2 Left.1 Left.2 Left.3 P1.1 P1.2 P1.3 P1.4 P2.1 P2.2 P2.3 P2.4 P2.5 P2.6 P3.1 PWR.A PWR.K R1.1 R1.2 R2.1 R2.2 R3.1 R3.2 R4.1 R4.2 R5.1 R5.2 R6.1 R6.2 R7.1 R7.2 R8.1 R8.2 R9.1 R9.2 R10.1 R10.2 R11.1 R11.2 R12.1 R12.2 R13.1 R13.2 R14.1 R14.2 R15.1 R15.2 R16.1 R16.2 Remote.1 Remote.2 Remote.3 RESET.1 RESET.2 Right.1 Right.2 Right.3 STLINK.1 STLINK.2 STLINK.3 STLINK.4 U1.1 U1.2 U1.3 U1.4 U1.5 U1.6 U1.7 U1.8 U2.0 U2.1 U2.2 U2.3 U2.4 U2.5 U3.1 U3.2 U3.3 U3.4 U3.5 U3.6 U3.7 U3.8 U3.9 U3.10 U4.1 U4.2 U4.3 U4.4 U4.5 U4.6 U4.7 U4.8 U4.9 U4.10 U4.11 U4.12 U4.13 U4.14 U4.15 U4.16 U4.17 U4.18 U4.19 U4.20 U4.21 U4.22 U4.23 U4.24 U4.25 U4.26 U4.27 U4.28 U4.29 U4.30 U4.31 U4.32 U4.33 U4.34 U4.35 U4.36 U4.37 U4.38 U4.39 U4.40 U4.41 U4.42 U4.43 U4.44 U4.45 U4.46 U4.47 U4.48 U4.49 U4.50 U4.51 U4.52 U4.53 U4.54 U4.55 U4.56 U4.57 U4.58 U4.59 U4.60 U4.61 U4.62 U4.63 U4.64 U4.65 U4.66 U4.67 U4.68 U4.69 U4.70 U4.71 U4.72 U4.73 U4.74 U4.75 U4.76 U4.77 U4.78 U4.79 U4.80 U4.81 U4.82 U4.83 U4.84 U4.85 U4.86 U4.87 U4.88 U4.89 U4.90 U4.91 U4.92 U4.93 U4.94 U4.95 U4.96 U4.97 U4.98 U4.99 U4.100 U4.101 U4.102 U4.103 U4.104 U4.105 U4.106 U4.107 U4.108 U4.109 U4.110 U4.111 U4.112 U4.113 U4.114 U4.115 U4.116 U4.117 U4.118 U4.119 U4.120 U4.121 U4.122 U4.123 U4.124 U4.125 U4.126 U4.127 U4.128 U4.129 U4.130 U4.131 U4.132 U4.133 U4.134 U4.135 U4.136 U4.137 U4.138 U4.139 U4.140 U4.141 U4.142 U4.143 U4.144 VR2.1 VR2.2 VR2.3 Y1.1 Y1.2 Y2. Y2.1 Y2.2
copper on no net: | length 96147.8
  Top Layer w8: 380,1940 445,2005 595,2005 660,2070 660,2099.96 623.76,2136.21 ; 395,844.96 v1(515,845) ; 395,915.04 474.06,915.04 475.63,916.61 ; 2215,3805 2215,3624.96 2224.96,3615 ; 2255,180 2255,230 ; 2255,280 2255,230 ; 2545.04,1310 2510.2,1275.17 2510.2,925.2 2405,820 2405,255 2380,230 2255,230
  Top Layer w10: 135,645 260.04,645 358.43,743.39 475.63,743.39 ; 135,745 245,745 300,800 480,800 495.31,784.69 495.31,743.39 ; 135,845 190,900 190,1069.68 ; 190,1382.68 v1(247.68,1382.68) ; 275,2150 v1(345,2150) 380,2150 ; 275,2220.08 v1(320,2220.08) 359.88,2220.08 359.88,2210.12 400,2170 534.29,2170 595.92,2108.37 ; v1(326.53,2725) 401.46,2799.92 401.46,2800 475,2873.54 475,2932.64 475,3015 965,3505 965,3740 1119.96,3894.96 2125.04,3894.96 2215,3805 ; 331.38,2800 331.38,2801.38 425,2895 425,2932.64 v1(425,3025) 375,3075 375,3137.36 ; 369.96,1560 369.96,1560.08 411.82,1601.94 v1(495,1601.94) 534.9,1601.94 735.11,1802.14 ; 375,2932.64 275,2832.64 275,2512.8 637.67,2150.13 ; 379.96,2559.92 379.96,2559.84 434.81,2505 v1(505,2505) 533.35,2505 762.95,2275.4 ; 380,1840 466.74,1840 582,1955.26 ; 425,3137.36 425,3279.96 419.96,3285 419.96,3609.96 595,3785 ; 430,1115 495.31,1049.68 495.31,916.61 ; 430,1215 515,1130 515,916.61 ; 430.04,2220 v1(512.13,2220) 609.84,2122.29 ; 450.04,2559.92 v1(506.27,2559.92) 776.87,2289.32 ; 475,3137.36 475,3269.96 490.04,3285 490.04,3483.19 791.85,3785 ; v1(515,845) v1(515,845) 515,743.39 ; 525,2932.64 525,2844.96 325,2644.96 325,2490.64 651.59,2164.05 ; 534.69,916.61 534.69,969.69 v1(554.51,989.51) 574.96,1009.96 600,1009.96 693.35,1009.96 697.42,1009.96 ; 550,1340 551.36,1340 v1(624.96,1413.61) 874.3,1662.95 ; 550,2719.96 v1(605,2719.96) 624.62,2719.96 916.06,2428.52 ; 550,2790.04 582.38,2790.04 v1(605,2767.42) 929.98,2442.44 ; 582,2094.45 526.45,2150 380,2150 ; 600,1080.04 693.35,1080.04 ; 665.51,2177.97 703.48,2140 v1(703.48,2093.48) ; 679.43,2191.89 730,2141.32 v1(730,2045) ; 693.35,2205.81 v1(762.95,2136.21) ; 735.11,2247.56 782.67,2200 820.27,2200 1130,2509.73 1130,2972.98 1271.67,3114.65 ; 745,105 745,665.08 834.92,755 835,755 944.92,755 945,754.92 ; 749.03,1788.22 520.81,1560 440.04,1560 440.04,1374.96 ; 749.03,2261.48 790.43,2220.08 814.9,2220.08 1112,2517.18 1112,3045.32 1050,3107.32 ; 789.96,1244.88 789.96,1355.9 985.66,1551.59 ; 835,684.92 925.08,684.92 935,675 935.08,675 990.12,619.96 990.12,150.12 945,105 ; 845,105 845,514.92 935,604.92 ; v1(860.04,1100.04) 860.04,1244.88 ; 888.22,1649.03 695.04,1455.85 v1(695.04,1385.93) 599.55,1290.45 599.5,1290.39 524.61,1290.39 440.04,1374.96 ; 935,825 v1(935,1365) ; 940,599.92 945,604.92 ; 957.82,1579.43 1148,1769.61 1148,2878 1367.32,3097.32 1493.33,3097.32 ; 971.74,1565.51 1166.78,1760.55 1166.78,2851.78 1335,3020 1637.68,3020 1715,3097.32 ; 999.58,1537.67 v1(1069.18,1607.27) ; 1013.5,1523.76 1059.74,1570 v1(1125,1570) ; 1027.42,1509.84 990,1472.42 990,897.2 1426.1,461.1 ; 1050,3272.68 1150.13,3372.81 1150.13,3540 1150,3540.13 1150,3805 ; 1055.26,1482 1015,1441.74 1015,1344.69 1160,1199.69 1240,1199.69 ; 1069.18,1468.08 1069.18,1351.14 v1(1120.32,1300) 1160,1260.32 ; 1208.37,2581.63 1260,2633.26 v1(1260,2665) 1260,2714.96 ; 1222.29,2567.71 1355,2700.42 1355,2714.96 ; 1236.21,2553.79 1347.42,2665 1461.76,2665 2256.76,3460 2320,3460 2415,3555 2415,3805 ; 1240,1260.32 1240.28,1260.04 v1(1280,1260.04) 1335,1260.04 1435,1260.04 ; 1250,3805 1250,3480.13 1250.13,3480 1250.13,3384.87 1271.67,3363.33 1271.67,3280 ; 1250.13,2539.87 1357.26,2647 1492,2647 1663.06,2818.06 1663.06,2818.26 2264.8,3420 2390,3420 2515,3545 2515,3805 ; 1260,2785.04 v1(1307.5,2785.04) 1355,2785.04 ; 1305.81,1565.51 1553.98,1317.34 1553.98,1160 1498.98,1105 1434.92,1040.94 1434.92,955 ; 1319.73,1579.43 1571.98,1327.18 1571.98,1154.05 1621.02,1105 1670.04,1055.98 1670.04,955 ; 1335,1189.96 1435,1189.96 1435.08,1189.96 1490,1244.88 1490,1325.64 1277.97,1537.67 1230.64,1585 1230,1585 1230,1622.03 1344.84,1736.87 1385,1736.87 1431.08,1690.79 v1(1705,1416.87) 1705,1355.04 ; 1347.56,2442.44 1695.17,2790.04 ; 1361.48,2428.52 1652.93,2719.96 1705,2719.96 v1(1765,2719.96) ; v1(1415,2080) 1415,1734.71 1445,1704.71 ; 1417.16,1676.87 1640,1454.03 v1(1640,1390) 1640,1349.88 1704.92,1284.96 1705,1284.96 ; 1425,460 1425,107.2 1427.2,105 ; v1(1434.92,1525) 1620,1339.92 1620,1180 1830,970 1830,455 1830,110 ; 1486.76,1746.47 1790,1443.22 1790,1195 1965,1020 2474.96,1020 ; 1486.76,2303.24 1723.52,2540 v1(1775,2540) 1839.96,2540 1839.96,2720.04 v1(1769.96,2790.04) 1705,2790.04 ; 1493.33,3262.68 1660,3429.34 1660,3525 1660,3805 ; 1500.68,1760.38 1810,1451.06 1810,1219.69 1914.68,1115 2474.96,1115 ; 1500.68,2289.32 1709.42,2498.06 v1(1745,2498.06) 1868.18,2498.06 1910.04,2539.92 1910.04,2540 ; 1505,955 v1(1552.48,955) 1599.96,955 ; 1514.6,1774.3 1688.9,1600 1999.96,1600 2049.96,1550 ; v1(1521.21,2085) 1521.21,1851.21 1556.36,1816.06 ; 1528.52,1788.22 1698.74,1618 2052.12,1618 2120.04,1550.08 2120.04,1550 ; 1542.44,1802.14 1694.58,1650 v1(1760,1650) ; 1542.44,2247.56 1729.87,2435 1839.96,2435 ; v1(1580,2090.26) 1639.87,2150.13 ; 1612.03,1871.74 1767.71,1716.06 v1(1905,1716.06) 1964.96,1716.06 ; 1625.95,1885.66 1753.61,1758 1993.18,1758 2035.04,1716.14 ; 1639.87,1899.58 1734.45,1805 v1(1905,1805) 1964.96,1805 ; 1653.79,1913.5 1682.29,1885 v1(1905,1885) 1954.96,1885 1964.96,1895 1964.96,1985 1964.96,2075 ; 1653.79,2136.21 1725,2207.42 1725,2230.4 1797.84,2303.24 2028.24,2303.24 2465,2740 2465,2955 2465,2965 ; 1667.71,2122.29 v1(1775.42,2230) 1834.96,2230 ; 1681.63,2108.37 1761.32,2188.06 1863.18,2188.06 1905.04,2229.92 1905.04,2230 ; 1715,3262.68 1760,3307.68 1760,3550 1760,3805 ; v1(1805,1550) 1884.92,1550 ; v1(1910.04,2345.04) 1910.04,2435 ; 1955,1550 2049.96,1550 ; 1990,1380 2049.96,1439.96 2049.96,1550 ; 2035.04,1716.06 2035.04,1716.14 ; 2035.04,1985 2035.04,1895 2035.04,1805 v1(2035.04,1760.57) 2035.04,1716.14 ; 2182.13,1380 2120.04,1442.09 2120.04,1550 ; 2200,1174.69 2335.31,1310 2474.96,1310 2474.96,1394.96 ; 2214.96,1550 2120.04,1550 ; v1(2270,880) 2270,365 2355,280 ; 2285.04,1550 v1(2365,1550) 2390,1550 2474.96,1465.04 ; 2315,3615 2315,3805 ; v1(2380,1255) 2425,1210 2474.96,1210 ; 2545.04,1020 2809.96,1020 ; 2545.04,1115 2809.96,1115 ; 2545.04,1210 2809.96,1210 ; 2700,180 2961.67,180 3223.33,180 3485,180 ; 2700,280 2961.67,280 3223.33,280 3485,280 ; 2700,380 2961.67,380 3223.33,380 3485,380 ; 2700,480 2961.67,480 3223.33,480 3485,480 ; 380,2150 380,2040 285,1945 285,1530 440.04,1374.96
  Top Layer w12: 190,1130.31 190,1217.32
  Top Layer w15: 1964.96,1716.06 1964.96,1712.45 2032.09,1645.32 2790,1645.32 ; 2035.04,2075 2544.68,2075 2882.18,1737.5 2790,1645.32 ; 2545.04,1310 2545.04,1400.35 2790,1645.32
  Top Layer w20: 2880.04,1020 2882.18,1022.14 2882.18,1676.87 3011.89,1676.87 3248.11,1676.87 3436.87,1676.87 3490,1730 3725,1730
  Top Layer w30: 2215,3805 2304.96,3894.96 2740,3894.96 2810,3824.96 2810,2955 ; 2565,2955 2810,2955 ; 2975,2682.32 3007.68,2715 v2(3100,2715) v2(3180,2715) 3309.49,2715 ; 2975,2847.68 3040.75,2781.93 3309.49,2781.93 3413.07,2781.93 3500,2695 3500,2295 ; v2(2995,1955.26) 2995,2074.76 ; 2995,2295 v2(3158.07,2295) ; 3115,3135 3117.32,3137.32 3310,3137.32 3309.49,3136.81 3309.49,2848.86 ; 3248.11,1586.32 v2(3363.68,1586.32) 3648.45,1586.32 3725,1509.76 ; 3248.11,1767.42 3250,1769.31 3250,2010 3158.07,2101.93 v2(3158.07,2295) ; 3249.96,1875 2945,1875 2810,2010 2810,2955 ; 3250,2295 v2(3158.07,2295) ; 3309.49,2581.14 v2(3433.86,2581.14) ; 3309.49,2648.07 3223.07,2648.07 3158.07,2583.07 v2(3158.07,2295) ; 3310,3302.68 3313.23,3305.91 3715,3305.91 ; 3320.04,1875 3450,2004.96 3450,2010 v2(3565,2010) ; 3485,480 3485,1140
  Bottom Layer w8: 945,105 1020,180 2255,180
  Bottom Layer w10: v1(326.53,2725) 249.43,2647.9 249.43,1110.57 370.49,989.51 v1(554.51,989.51) ; 330,1115 380,1165 380,1250 730,1600 v1(730,2045) ; 330,1215 330,1275 703.48,1648.48 v1(703.48,2093.48) ; v1(345,2150) 345,2345 v1(505,2505) 605,2605 v1(605,2719.96) ; v1(695.04,1385.93) 780.97,1300 v1(1120.32,1300) 1230.32,1190 v1(1385,1190) ; v1(762.95,2136.21) 763.79,2136.21 935,1965 v1(935,1365) ; v1(860.04,1100.04) 860,740 1370,230 2305,230 2355,180 ; v1(1069.18,1607.27) 1237.73,1607.27 2465,380 2700,380 ; v1(1125,1570) 1249.54,1570 2539.54,280 2700,280 ; v1(1260,2665) 1385.04,2790.04 v1(1769.96,2790.04) ; v1(1415,2080) 1415,2320.04 2615,3520.04 2615,3805 ; v1(1434.92,1525) 1434.92,1945.18 v1(1580,2090.26) ; v1(1521.21,2085) 1521.21,2381.21 2677.5,3537.5 2715,3575 2715,3805 ; v1(1705,1416.87) 1705,1660 1761.06,1716.06 ; v1(1760,1650) 1760,1358.78 1944.09,1174.69 2200,1174.69 ; v1(1775,2540) 1775,2230.42 v1(1775.42,2230) 1760,2214.58 1760,2174.64 1761.06,2173.58 1761.06,1716.06 ; v1(1905,1716.06) 1761.06,1716.06 ; v1(1910.04,2345.04) 2270,1985.08 v1(2270,880)
  Bottom Layer w30: 3028.07,2295 3485,1838.07 3485,1140
  other v1: 645,1080 1385,1260 2035,1850 2035,1940 1785,2185
  other v3: 196.85,201.85 3740.16,201.85 196.85,3745.16 3740.16,3745.16

## Polygon pours and split planes (outlines as drawn)
no net on Bottom Layer "Bottom Layer-GND" (solid, pour order 2): 0,3942.01 3937.01,3942.01 3937.01,5 0,5

## Keep-outs
Keep-Out Layer:
  lines w10: 0,5 0,3942.01 3937.01,3942.01 3937.01,5 0,5

## Silkscreen, mask and mechanical layers (free items; w line width, h text height)
Top Overlay:
  text "CANH CANL" at 595,3515 h60

## Dimensions
0,5 to 0,3942.01 on Top Overlay
196.85,3745.16 to 196.85,201.85 on Top Overlay
196.85,3745.16 to 3740.16,3745.16 on Top Overlay
3937.01,3942.01 to 0,3942.01 on Top Overlay

## Text inside footprints (layer, text, board x,y; h text height)
C3: Top Overlay "+" at 3397,1172 h60 r180
C7: Top Overlay "+" at 3203,3103 h60
C35: Top Overlay "+" at 1337,492 h59.06 r180
C36: Top Overlay "+" at 1742,487 h59.06 r180
P1: Top Overlay "1" at 450,1035 h60 r90; Top Overlay "2" at 350,1015 h60 r90; Top Overlay "4" at 350,1275 h60 r90; Top Overlay "3" at 450,1275 h60 r90
P2: Top Overlay "1" at 2175,160 h60; Top Overlay "2" at 2155,260 h60; Top Overlay "5" at 2515,160 h60; Top Overlay "6" at 2515,260 h60